# Allegro board r820t2.brd
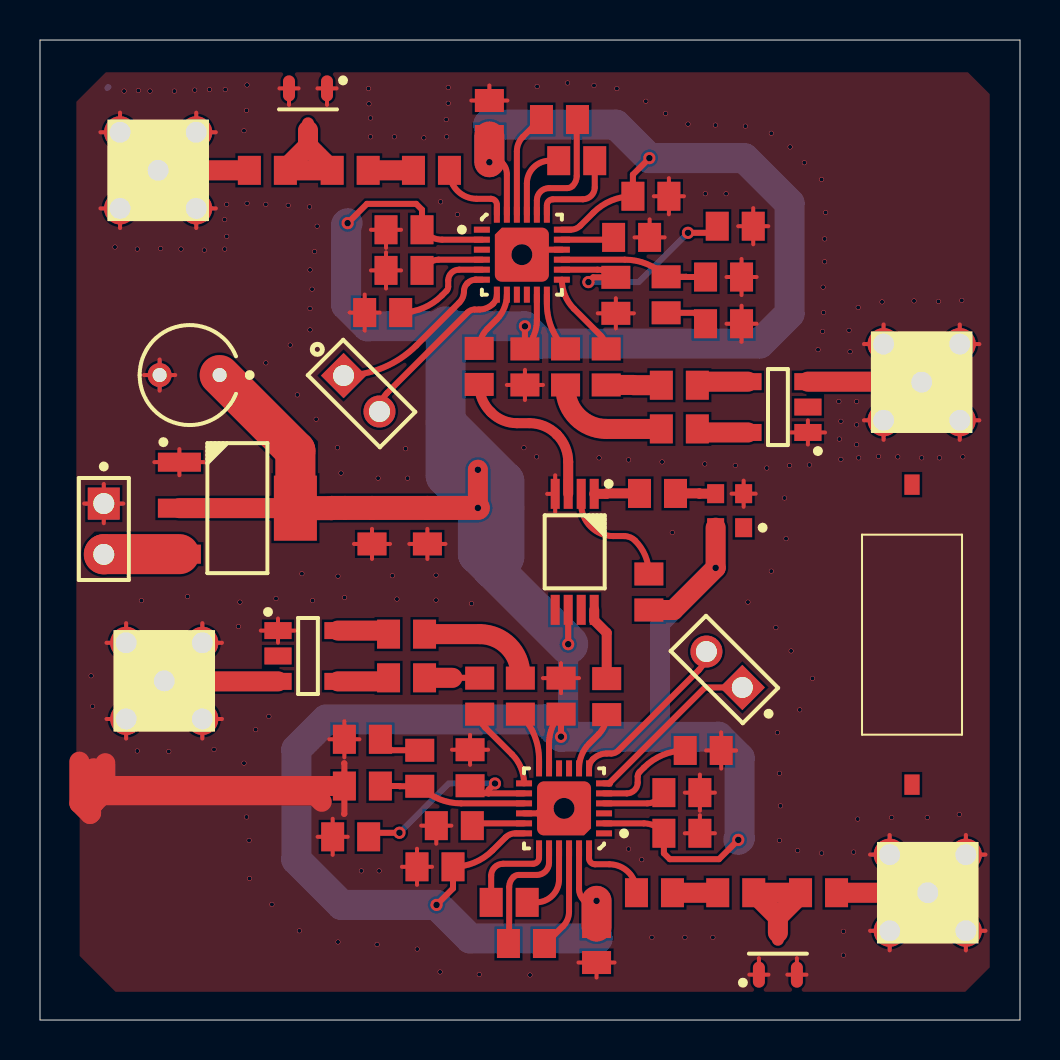
[diagram p0: board, top side]
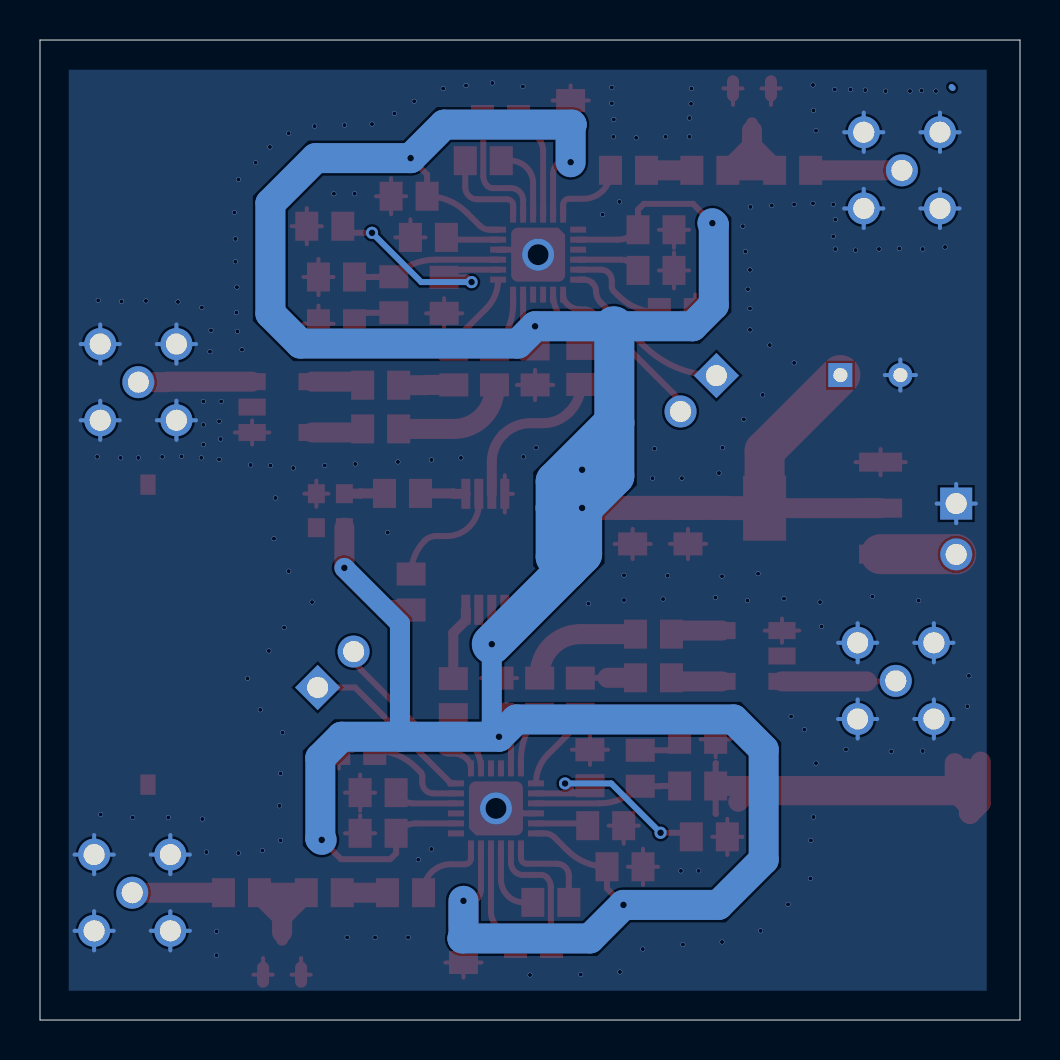
[diagram p1: board, bottom side, seen from below]

Outline 49 x 49 mm; copper layers: TOP, BOTTOM. Coordinates in mm from the lower left corner of the outline.
Outline path: 0,49 49,49 49,0 0,0 0,49

## Placement (name value [footprint] x y rotation side)
C1  330pF  [R0805]  15.51 42.48 0 top
C3  27pF/10nF  [R0805]  11.37 42.48 0 top
C5  1uF  [R0805]  18.2 37.48 0 top
C6  0.1uF  [R0805]  17.13 35.37 0 top
C7  20pF  [R0805]  21.96 32.68 90 top
C9  0.1uF  [R0805]  22.47 45.07 90 top
C10  0.1uF  [R0805]  30.55 41.19 0 top
C11  0.1uF  [R0805]  29.58 39.13 180 top
C12  330nF  [R0805]  34.18 37.15 180 top
C13  6.8nF  [R0805]  34.18 34.81 180 top
C14  0.1uF  [R0805]  31.97 29.55 180 top
C15  0.1uF  [R0805]  31.97 31.74 180 top
C16  0.1uF  [R0805]  28.79 36.23 270 top
C28  100nF  [R0805]  19.37 24.7 270 top
C29  330pF  [R0805]  16.6 24.7 90 top
C30  10uF  [CAPPRD300W51D500H1295P]  7.48 32.25 180 top
C31  0.1uF  [R0805]  18.2 39.51 180 top
C32  0.1uF  [R0805]  24.25 32.65 90 top
C49  0.1uF  [R0805]  30.88 26.33 0 top
C50  330pF  [R0805]  34.79 6.36 180 top
C51  27pF/10nF  [R0805]  38.93 6.36 180 top
C52  1uF  [R0805]  32.09 11.37 180 top
C53  0.1uF  [R0805]  33.16 13.48 180 top
C54  20pF  [R0805]  28.34 16.17 270 top
C55  0.1uF  [R0805]  32.09 9.34 0 top
C56  0.1uF  [R0805]  27.83 3.77 270 top
C57  0.1uF  [R0805]  20.72 9.72 0 top
C58  330nF  [R0805]  16.12 11.7 0 top
C59  6.8nF  [R0805]  16.12 14.04 0 top
C60  0.1uF  [R0805]  19.75 7.66 180 top
C61  0.1uF  [R0805]  18.33 19.29 0 top
C62  0.1uF  [R0805]  26.05 16.19 270 top
C63  0.1uF  [R0805]  18.33 17.11 0 top
C64  0.1uF  [R0805]  21.5 12.61 90 top
D1  BAV99/SOT  [SOT95P237X112-3N]  13.4 45.53 270 top
D2  BAV99/SOT  [SOT95P237X112-3N]  36.9 3.32 90 top
J3  -  [SMA]  44.08 31.89 0 top
J4  -  [SMA]  5.91 42.48 0 top
J5  HEADER 2  [HDRV2W64P254_1X2_508X254X838P]  3.19 25.82 270 top
J6  HEADER 2  [HDRV2W64P254_1X2_508X254X838P]  15.18 32.22 315 top
J7  -  [SMA]  6.21 16.96 180 top
J8  -  [SMA]  44.39 6.36 180 top
J9  HEADER 2  [HDRV2W64P254_1X2_508X254X838P]  35.12 16.63 135 top
L1  8.2nH  [R0805]  19.57 42.48 0 top
L4  150nH  [R0805]  25.97 45.02 0 top
L5  150nH  [R0805]  26.84 42.97 0 top
L6  8.2nH  [R0805]  30.72 6.36 180 top
L7  150nH  [R0805]  24.32 3.82 180 top
L8  150nH  [R0805]  23.46 5.88 180 top
R2  1.8K  [R0805]  31.31 36.26 270 top
R4  220  [R0805]  28.31 32.65 270 top
R5  220  [R0805]  26.28 32.65 270 top
R20  1.8K  [R0805]  30.44 21.4 270 top
R21  1.8K  [R0805]  34.76 39.69 0 top
R22  1.8K  [R0805]  18.99 12.59 90 top
R23  220  [R0805]  21.99 16.19 90 top
R24  220  [R0805]  24.02 16.19 90 top
R25  1.8K  [R0805]  15.53 9.16 180 top
R26  TEST_SYMBOL  [1CMX0_5CM]  43.6 19.27 90 top
U2  R820t  [R820T]  24.09 38.27 0 top
U4  AMS1117  [AMS1117_SOT223]  9.87 25.59 0 top
U5  TC-1T  [TC1-1T]  36.9 30.65 180 top
U8  -  [5PB1102PGGI]  26.74 23.41 270 top
U9  OSC28.8Mhz  [OSC2016]  34.48 25.47 180 top
U10  R820t  [R820T]  26.2 10.58 180 top
U11  TC-1T  [TC1-1T]  13.4 18.2 0 top

## Library data of the parts
C1 C3 C5-C7 C9-C16 C28 C29 C31 C32 C49-C64 = CAPACITOR NON-POL
C30 = CAP
D1 D2 = BAV99/SOT
J3 J4 J7 J8 = SMA
J5 J6 J9 = HEADER 2
L1 L4-L8 = INDUCTOR AUDIO
R2 R4 R5 R20-R26 = R
U2 U10 = R820t
U4 = AMS1117
U5 U11 = TC-1T
U8 = 5PB1102PGGI
U9 = OSC28.8Mhz

## Footprints (pads in the part's own frame, mm; a bottom-side part is the same pattern mirrored in y, then rotated)
1CMX0_5CM
  rect 1.016x0.762 smd: 1(-7.5,0) 2(7.5,0)
5PB1102PGGI
  rect 1.5x0.45 smd: 1(-2.9,0.975) 2(-2.9,0.325) 3(-2.9,-0.325) 4(-2.9,-0.975) 5(2.9,-0.975) 6(2.9,-0.325) 7(2.9,0.325) 8(2.9,0.975)
AMS1117_SOT223
  rect 2.15x0.95 smd: 1(-2.9,2.3) 2(-2.9,0) 3(-2.9,-2.3)
  rect 2.15x3.25 smd: 4(2.9,0)
CAPPRD300W51D500H1295P
  rect 1.2x1.2 hole 0.7: 1(-1.5,0)
  round 1.2 hole 0.7: 2(1.5,0)
HDRV2W64P254_1X2_508X254X838P
  rect 1.6x1.6 hole 1.05: 1(0,0)
  round 1.6 hole 1.05: 2(2.54,0)
OSC2016
  rect 0.85x0.95 smd: 1(-0.7,0.85) 2(-0.7,-0.85) 3(0.7,-0.85) 4(0.7,0.85)
R0805
  rect 1.15x1.45 smd: 1(-0.9,0) 2(0.9,0)
R820T
  rect 0.8x0.3 smd: 1(-2,1.25) 2(-2,0.75) 3(-2,0.25) 4(-2,-0.25) 5(-2,-0.75) 6(-2,-1.25) 13(2,-1.25) 14(2,-0.75) 15(2,-0.25) 16(2,0.25) 17(2,0.75) 18(2,1.25)
  rect 0.3x0.8 smd: 7(-1.25,-2) 8(-0.75,-2) 9(-0.25,-2) 10(0.25,-2) 11(0.75,-2) 12(1.25,-2) 19(1.25,2) 20(0.75,2) 21(0.25,2) 22(-0.25,2) 23(-0.75,2) 24(-1.25,2)
  custom 2.7x2.7 smd: 25(0,0)
SMA
  round 1.6 hole 1.05: 1(0,0) 2(1.905,1.905) 3(1.905,-1.905) 4(-1.905,-1.905) 5(-1.905,1.905)
SOT95P237X112-3N
  oval 1.3x0.6 smd: 1(-1.05,0.95) 2(-1.05,-0.95) 3(1.05,0)
TC1-1T
  rect 1.36x0.85 smd: 1(-1.5,1.27) 2(-1.5,0) 3(-1.5,-1.27) 4(1.5,-1.27) 6(1.5,1.27)

## Nets
GND: C5.1 C6.1 C9.2 C10.2 C11.1 C12.1 C13.1 C16.2 C28.2 C29.1 C30.2 C31.2 C32.1 C52.1 C53.1 C55.2 C56.2 C57.1 C58.1 C59.1 C60.2 C62.1 C64.2 D1.1 D1.2 D2.1 D2.2 J3.2 J3.3 J3.4 J3.5 J4.2 J4.3 J4.4 J4.5 J5.1 J7.2 J7.3 J7.4 J7.5 J8.2 J8.3 J8.4 J8.5 R21.2 R25.2 U2.16(GND_16) U2.25(PAD) U4.1(GND) U5.1 U8.4(GND) U9.2(GND) U10.16(GND_16) U10.25(PAD) U11.1
VCC3V3: C9.1 C10.1 C28.1 C29.2 C30.1 C31.1 C32.2 C55.1 C56.1 C60.1 C62.2 R20.2 U2.2(VCC_2) U2.11(VCC_11) U2.18(VCC_18) U2.23(VCC_23) U4.2(VOUT) U4.4(OUT) U8.6(VCC) U9.4(VDD) U10.2(VCC_2) U10.11(VCC_11) U10.18(VCC_18) U10.23(VCC_23)
VCC5V: J5.2 U4.3(VIN)
CLK_1: C7.1 U8.3(Y0)
CLK_2: C54.1 U8.8(Y1)
CLK_IN: C49.1 U8.1(CLK_IN)
N00923: R5.1 U2.12(IF_N)
N01579: L1.2 U2.24(RF_IN)
N01613: C1.2 L1.1
N01685: C1.1 C3.2 D1.3
N02319: C5.2 U2.4(DET1)
N02329: C6.2 U2.5(DET2)
N02509: C7.2 U2.8(XTAL_I)
N03111: L4.1 U2.22(TF1P)
N03115: L5.1 U2.21(TF1N)
N03119: L5.2 U2.19(TF2N)
N03131: L4.2 U2.20(TF2P)
N03936: C11.2 U2.17(VDD_PLL)
N04054: C12.2 R2.1 U2.15(CP)
N04195: C13.2 R2.2
N04932: C16.1 R21.1 U2.14(IF_AGC)
N04990: C14.1 U5.6
N05012: R4.1 U2.13(IF_P)
N05168: C15.1 U5.4
N05567: C15.2 R4.2
N05644: C14.2 R5.2
N06440: J6.2 U2.7(SDA)
N32998: J3.1 U5.3
N34016: C3.1 J4.1
N38417: R20.1 U8.2(OE)
N39782: C49.2 U9.3(OUT)
N42339: J6.1 U2.6(SCL)
N50631: R24.1 U10.12(IF_N)
N50647: L6.2 U10.24(RF_IN)
N50677: C50.2 L6.1
N50697: C50.1 C51.2 D2.3
N50745: C52.2 U10.4(DET1)
N50769: C53.2 U10.5(DET2)
N50833: C54.2 U10.8(XTAL_I)
N50893: L7.1 U10.22(TF1P)
N50897: L8.1 U10.21(TF1N)
N50901: L8.2 U10.19(TF2N)
N50929: L7.2 U10.20(TF2P)
N51037: J9.1 U10.6(SCL)
N51041: C57.2 U10.17(VDD_PLL)
N51069: C58.2 R22.1 U10.15(CP)
N51145: C59.2 R22.2
N51193: C64.1 R25.1 U10.14(IF_AGC)
N51213: C61.1 U11.6
N51217: R23.1 U10.13(IF_P)
N51261: C63.1 U11.4
N51273: C63.2 R23.2
N51293: C61.2 R24.2
N51433: J9.2 U10.7(SDA)
N51449: J7.1 U11.3
N51529: C51.1 J8.1

Pads without a net: R26 1 2; U2 1 3 9 10; U5 2; U8 5 7; U9 1; U10 1 3 9 10; U11 2

## Via types
v1: diameter 0.61, hole 0.33, TOP to BOTTOM, 16 vias
v2: diameter 0.24, hole 0.21, TOP to BOTTOM, 164 vias
v3: diameter 1.6, hole 1.05, TOP to BOTTOM, 2 vias

## Routing (per net, layer and track width the routed paths; a pad name or vN(x,y) marks a point on that pad's centre or on a via; arc(x,y) is an arc through that point)
GND: length 269.3
  TOP w0.2: 13.88,9.16 R25.2 ; R25.2 15.39,9.16 ; R25.2 14.63,8.26 ; R25.2 14.63,10.06 ; 13.87,46.58 D1.1 ; D1.1 14.83,46.58 ; D1.1 14.35,45.75 ; 16.23,34.47 C6.1 ; C6.1 15.48,35.37 ; C6.1 16.99,35.37 ; C6.1 16.23,36.27 ; 6.97,27.24 U4.1 ; U4.1 6.97,28.55 ; U4.1 8.22,27.89 ; U4.1 5.72,27.89 ; J7.2 5.29,15.05 ; J7.2 4.31,16.03 ; J7.2 3.33,15.05 ; J7.2 4.31,14.07 ; 29.73,39.13 C11.1 ; C11.1 30.48,40.03 ; C11.1 31.23,39.13 ; C55.2 32.99,10.24 ; C55.2 33.75,9.34 ; C55.2 32.24,9.34 ; C30.2 5.98,33.02 ; C30.2 5.98,31.47 ; C30.2 6.76,32.25 ; C30.2 5.2,32.25 ; 25.76,25.38 U8.4 ; U8.4 25.76,27.24 ; U8.4 25.36,26.31 ; 19.06,9.72 C57.1 ; C57.1 20.57,9.72 ; C57.1 19.82,8.81 ; C5.1 17.3,38.38 ; C5.1 18.05,37.48 ; C5.1 17.3,36.58 ; C5.1 16.55,37.48 ; U5.1 39.25,29.38 ; U5.1 38.4,28.77 ; U5.1 37.54,29.38 ; U5.1 38.4,29.98 ; J4.3 8.79,40.58 ; J4.3 6.83,40.58 ; J4.3 7.81,39.6 ; J4.3 7.81,41.56 ; 15.7,23.8 C29.1 ; C29.1 16.6,23.05 ; C29.1 17.5,23.8 ; C29.1 16.6,24.56 ; C56.2 28.73,2.87 ; C56.2 27.83,2.12 ; C56.2 26.92,2.87 ; 26.05,16.34 C62.1 ; C62.1 26.95,17.09 ; C62.1 25.15,17.09 ; C62.1 26.05,17.85 ; 34.91,39.69 R21.2 ; R21.2 35.66,40.59 ; R21.2 36.41,39.69 ; R21.2 35.66,38.79 ; 7.14,18.86 J7.4 ; J7.4 9.1,18.86 ; J7.4 8.12,19.84 ; J7.4 8.12,17.88 ; 27.89,35.33 C16.2 ; C16.2 29.7,35.33 ; C16.2 28.79,36.09 ; C16.2 28.79,34.58 ; C10.2 32.2,41.19 ; C10.2 30.69,41.19 ; C10.2 31.45,42.09 ; C10.2 31.45,40.28 ; J8.2 43.46,4.46 ; J8.2 41.51,4.46 ; J8.2 42.48,3.48 ; J8.2 42.48,5.44 ; 4,43.41 J4.5 ; J4.5 4,45.37 ; J4.5 4.98,44.39 ; J4.5 3.02,44.39 ; J4.2 7.81,45.37 ; J4.2 6.83,44.39 ; J4.2 8.79,44.39 ; J4.2 7.81,43.41 ; D1.2 12.93,46.58 ; D1.2 11.97,46.58 ; D1.2 12.45,45.75 ; C28.2 20.27,23.8 ; C28.2 19.37,24.56 ; C28.2 18.47,23.8 ; C28.2 19.37,23.05 ; U11.1 11.9,20.07 ; U11.1 12.76,19.47 ; U11.1 11.04,19.47 ; U11.1 11.9,18.87 ; 46.29,3.48 J8.5 ; J8.5 45.32,4.46 ; J8.5 46.29,5.44 ; J8.5 47.27,4.46 ; 41.2,33.8 J3.5 ; J3.5 42.18,32.82 ; J3.5 42.18,34.77 ; J3.5 43.16,33.8 ; J8.4 47.27,8.27 ; J8.4 45.32,8.27 ; J8.4 46.29,9.25 ; J8.4 46.29,7.29 ; 3.02,40.58 J4.4 ; J4.4 4.98,40.58 ; J4.4 4,41.56 ; J4.4 4,39.6 ; 42.18,29.01 J3.4 ; J3.4 41.2,29.99 ; J3.4 43.16,29.99 ; J3.4 42.18,30.96 ; C52.1 32.99,12.27 ; C52.1 33.75,11.37 ; C52.1 32.24,11.37 ; C52.1 32.99,10.47 ; U9.2 35.18,26.97 ; U9.2 34.58,26.32 ; U9.2 35.18,25.66 ; U9.2 35.79,26.32 ; 15.22,13.13 C59.1 ; C59.1 14.46,14.04 ; C59.1 15.97,14.04 ; C59.1 15.22,14.94 ; C53.1 34.81,13.48 ; C53.1 34.06,12.57 ; C53.1 33.31,13.48 ; C53.1 34.06,14.38 ; C13.1 35.83,34.81 ; C13.1 34.32,34.81 ; C13.1 35.08,33.91 ; C13.1 35.08,35.72 ; 21.57,45.97 C9.2 ; C9.2 23.37,45.97 ; C9.2 22.47,46.73 ; 18.1,7.66 C60.2 ; C60.2 19.6,7.66 ; C60.2 18.85,8.56 ; C60.2 18.85,6.76 ; 34.32,37.15 C12.1 ; C12.1 35.83,37.15 ; C12.1 35.08,38.05 ; C12.1 35.08,36.25 ; 16.55,39.51 C31.2 ; C31.2 17.3,38.61 ; C31.2 18.05,39.51 ; J5.1 3.19,26.8 ; J5.1 3.19,24.84 ; J5.1 2.21,25.82 ; J5.1 4.17,25.82 ; D2.2 37.85,3.09 ; D2.2 37.37,2.27 ; D2.2 38.32,2.27 ; 4.31,17.88 J7.3 ; J7.3 3.33,18.86 ; J7.3 5.29,18.86 ; J7.3 4.31,19.84 ; D2.1 36.42,2.27 ; D2.1 35.47,2.27 ; D2.1 35.95,3.09 ; 42.48,7.29 J8.3 ; J8.3 41.51,8.27 ; J8.3 42.48,9.25 ; J8.3 43.46,8.27 ; C32.1 24.25,32.51 ; C32.1 24.25,31 ; C32.1 25.15,31.75 ; C32.1 23.34,31.75 ; 45.99,32.82 J3.2 ; J3.2 46.97,33.8 ; J3.2 45.01,33.8 ; J3.2 45.99,34.77 ; 45.99,29.01 J3.3 ; J3.3 45.01,29.99 ; J3.3 45.99,30.96 ; J3.3 46.97,29.99 ; 8.12,14.07 J7.5 ; J7.5 8.12,16.03 ; J7.5 9.1,15.05 ; J7.5 7.14,15.05 ; C64.2 21.5,14.27 ; C64.2 20.6,13.51 ; C64.2 22.41,13.51 ; C64.2 21.5,12.76
  TOP w0.3: U10.16 24.87,10.33 25.12,10.58 v3(26.2,10.58) ; 15.2,12.84 15.22,12.83 C58.1 15.22,10.32 15.2,10.3 ; U2.16 24.34,38.52 v3(24.09,38.27)
  TOP w1: C58.1 3.55,11.7 3.27,11.41 ; 3.27,11.41 3.27,12.84 ; 3.27,11.41 3.09,11.24 ; 3.09,11.24 13.76,11.24 14.09,10.91 ; 3.09,11.24 2.68,10.83 ; 2.68,10.83 2.55,10.7 2.55,10.35 2.5,10.3 1.97,10.83 1.97,12.92 ; 2.68,10.83 2.68,12.59
  BOTTOM w0.2: J3.5 43.16,33.8 ; J3.5 42.18,34.77 ; J3.5 42.18,32.82 ; J3.5 41.2,33.8 ; 41.2,29.99 J3.4 ; J3.4 42.18,30.96 ; J3.4 42.18,29.01 ; J3.4 43.16,29.99 ; J8.3 42.48,9.25 ; J8.3 42.48,7.29 ; J8.3 41.51,8.27 ; J8.3 43.46,8.27 ; J7.4 9.1,18.86 ; J7.4 8.12,19.84 ; J7.4 7.14,18.86 ; J7.4 8.12,17.88 ; J5.1 4.17,25.82 ; J5.1 3.19,24.84 ; J5.1 3.19,26.8 ; J5.1 2.21,25.82 ; J4.3 7.81,41.56 ; J4.3 8.79,40.58 ; J4.3 6.83,40.58 ; J4.3 7.81,39.6 ; J8.4 47.27,8.27 ; J8.4 46.29,9.25 ; J8.4 46.29,7.29 ; J8.4 45.32,8.27 ; 45.01,33.8 J3.2 ; J3.2 46.97,33.8 ; J3.2 45.99,32.82 ; J3.2 45.99,34.77 ; J7.2 5.29,15.05 ; J7.2 3.33,15.05 ; J7.2 4.31,14.07 ; J7.2 4.31,16.03 ; J7.3 5.29,18.86 ; J7.3 4.31,19.84 ; J7.3 3.33,18.86 ; J7.3 4.31,17.88 ; 42.48,3.48 J8.2 ; J8.2 41.51,4.46 ; J8.2 43.46,4.46 ; J8.2 42.48,5.44 ; 4,43.41 J4.5 ; J4.5 4,45.37 ; J4.5 4.98,44.39 ; J4.5 3.02,44.39 ; 45.99,29.01 J3.3 ; J3.3 45.99,30.96 ; J3.3 45.01,29.99 ; J3.3 46.97,29.99 ; J4.2 8.79,44.39 ; J4.2 7.81,43.41 ; J4.2 6.83,44.39 ; J4.2 7.81,45.37 ; J4.4 4.98,40.58 ; J4.4 4,39.6 ; J4.4 3.02,40.58 ; J4.4 4,41.56 ; C30.2 6.76,32.25 ; C30.2 5.2,32.25 ; C30.2 5.98,33.02 ; C30.2 5.98,31.47 ; 7.14,15.05 J7.5 ; J7.5 8.12,14.07 ; J7.5 9.1,15.05 ; J7.5 8.12,16.03 ; 45.32,4.46 J8.5 ; J8.5 46.29,5.44 ; J8.5 47.27,4.46 ; J8.5 46.29,3.48
  vias: v2(2.55,17.21) v2(2.63,15.69) v2(3.75,38.65) v2(4.21,46.45) v2(4.92,46.47) v2(4.87,38.55) v2(4.87,13.45) v2(5.07,20.97) v2(5.5,46.45) v2(6.03,38.57) v2(6.44,13.43) v2(6.72,46.45) v2(7.05,38.55) v2(7.38,21.17) v2(7.74,46.5) v2(8.22,38.5) v2(8.47,46.52) v2(8.7,13.53) v2(9.23,40.02) v2(9.23,38.55) v2(9.26,46.52) v2(9.34,40.78) v2(9.34,39.18) v2(9.92,19.67) v2(10,20.89) v2(10.2,44.46) v2(10.2,12.84) v2(10.33,45.48) v2(10.33,10.15) v2(10.35,46.75) v2(10.35,40.83) v2(10.45,8.98) v2(10.48,7.08) v2(10.78,14.52) v2(11.29,40.78) v2(11.29,32.86) v2(11.44,15.18) v2(11.6,5.78) v2(11.8,21.07) v2(12.41,40.73) v2(12.51,33.75) v2(12.87,31.26) v2(12.97,4.46) v2(13.1,22.32) v2(13.48,40.65) v2(13.5,37.5) v2(13.5,35.57) v2(13.5,34.51) v2(13.6,36.54) v2(13.63,20.97) v2(13.73,38.42) v2(13.81,30.04) v2(13.86,39.69) v2(14.87,28.61) v2(14.9,22.19) v2(14.9,3.9) v2(15.05,27.34) v2(15.23,21.12) v2(16.07,7.46) v2(16.42,46.57) v2(16.45,45.81) v2(16.52,45.1) v2(16.52,44.16) v2(16.91,27.09) v2(16.85,3.77) v2(16.96,7.46) v2(17.62,22.21) v2(17.72,44.16) v2(17.85,21.05) v2(18.28,28.56) v2(18.38,27.09) v2(18.86,3.55) v2(19.19,44.11) v2(19.8,22.24) v2(19.8,20.99) v2(20.03,40.91) v2(20,2.4) v2(20.31,45.02) v2(20.33,44.16) v2(20.41,46.62) v2(20.41,45.84) v2(20.87,40.27) v2(21.58,20.82) v2(21.96,2.27) v2(24.2,28.61) v2(24.5,2.25) v2(24.83,28.16) v2(24.86,46.67) v2(26.38,46.85) v2(27.7,46.73) v2(27.95,28.11) v2(28.84,46.57) v2(29.43,28.01) v2(29.43,8.55) v2(30.09,8.02) v2(30.29,45.94) v2(30.6,4.13) v2(31.1,27.9) v2(31.28,45.33) v2(31.61,24.37) v2(32.25,4.13) v2(32.4,44.79) v2(33.24,27.8) v2(33.26,41.31) v2(33.64,4.13) v2(33.77,44.74) v2(34.3,41.31) v2(34.76,27.73) v2(35.27,44.69) v2(35.4,20.89) v2(36.34,27.6) v2(36.56,44.34) v2(36.56,22.44) v2(36.79,19.62) v2(36.87,14.37) v2(36.97,12.33) v2(37.02,10.71) v2(36.97,8.98) v2(37.23,26.1) v2(37.3,24.07) v2(37.5,43.65) v2(37.48,27.73) v2(37.56,18.45) v2(37.89,8.47) v2(37.99,15.51) v2(38.22,42.86) v2(38.47,27.75) v2(38.62,17.08) v2(38.9,33.52) v2(39.08,42.03) v2(39.13,34.43) v2(39.08,8.35) v2(39.23,39.05) v2(39.23,37.91) v2(39.16,36.64) v2(39.18,35.37) v2(39.28,40.38) v2(39.94,30.93) v2(40.04,29.94) v2(39.97,29.05) v2(40.04,28.03) v2(40.17,4.43) v2(40.17,3.24) v2(40.45,34.48) v2(40.5,33.42) v2(40.68,8.4) v2(40.83,30.93) v2(40.83,29.76) v2(40.83,28.77) v2(40.91,35.63) v2(40.93,28.11) v2(40.88,10.05) v2(41.92,28.18) v2(42.1,35.9) v2(42.58,10.12) v2(42.89,28.16) v2(43.7,35.96) v2(44.08,28.11) v2(44.36,10.12) v2(44.92,35.93) v2(44.97,28.11) v2(45.96,10.28) v2(46.09,35.98) v2(46.14,28.16)
VCC3V3: length 228.6
  TOP w0.3: U8.6 v1(26.41,18.79) ; U2.2 20.11,39.02 arc(19.63,39.11) 19.23,39.38 C31.1 19.1,40.51 18.81,40.81 16.35,40.81 v1(15.38,39.84) ; U10.2 30.19,9.83 arc(30.66,9.74) 31.06,9.47 C55.1 31.19,8.33 31.49,8.04 33.95,8.04 v1(34.91,9.01) ; v1(19.83,5.75) 20.65,6.58 C60.1 arc(21.72,7.87) 22.63,8.48 23.28,9.13 arc(23.5,9.28) 23.76,9.33 U10.18 ; v1(30.47,43.09) 29.65,42.27 C10.1 arc(28.58,40.98) 27.67,40.37 27.01,39.71 arc(26.8,39.57) 26.54,39.52 U2.18 ; U2.11 24.84,35 arc(24.69,34.22) C32.2 v1(24.25,34.69) ; U10.23 26.95,6.56 arc(27.01,6.25) 27.19,5.98 27.35,5.83 arc(27.7,5.3) C56.1 ; v1(26.05,14.16) C62.2 arc(25.61,14.63) 25.45,13.85 U10.11 ; U2.23 23.34,42.28 arc(23.28,42.6) 23.1,42.86 22.95,43.02 arc(22.59,43.55) C9.1
  TOP w1: U4.4 U4.2 ; U9.4 v1(33.78,22.61) 31.68,20.5 R20.2 ; 14.57,25.59 15.24,25.59 15.25,25.6 ; v1(21.89,25.6) v1(21.89,27.51)
  TOP w1.2: v1(21.89,25.6) C28.1 C29.2 14.58,25.6 14.57,25.59 U4.4
  TOP w1.5: C9.1 v1(22.47,42.89) ; C56.1 v1(27.83,5.96)
  TOP w2: C30.1 12.77,28.46 U4.4
  BOTTOM w1: v1(26.41,18.79) 26.41,14.52 v1(26.05,14.16) ; v1(33.78,22.61) 31,19.83 31,14.19 30.98,14.16
  BOTTOM w1.5: v1(15.38,39.84) 15.31,39.77 15.31,35.75 16.37,34.69 v1(24.25,34.69) 25.11,33.82 35.98,33.82 37.48,35.32 37.48,40.83 35.22,43.09 v1(30.47,43.09) 28.79,44.77 22.42,44.77 22.47,44.72 v1(22.47,42.89) ; v1(27.83,5.96) 27.83,4.13 27.88,4.08 21.5,4.08 v1(19.83,5.75) 15.08,5.75 12.82,8.02 12.82,13.53 14.32,15.03 25.19,15.03 v1(26.05,14.16) 33.92,14.16 34.98,13.1 34.98,9.08 v1(34.91,9.01)
  BOTTOM w2: 22.63,22.57 v1(26.41,18.79) ; 22.63,22.57 23.22,23.16 23.22,25.6 ; 22.63,22.57 21.89,23.31 v1(21.89,25.6) ; 20.28,29.86 23.22,26.93 23.22,25.6 ; 20.28,29.86 20.28,34.66 20.31,34.69 ; 20.28,29.86 20.28,27.21 v1(21.89,25.6) ; v1(21.89,25.6) 23.22,25.6
VCC5V: length 3.8
  TOP w2: J5.2 3.2,23.29 U4.3
CLK_1: length 8.3
  TOP w0.5: U8.3 26.41,27.9 arc(26.26,28.64) 25.84,29.27 25.84,29.27 arc(25.21,29.69) 24.47,29.84 23.84,29.84 arc(23.15,29.98) 22.57,30.37 22.53,30.41 arc(22.11,31.04) C7.1
CLK_2: length 3.7
  TOP w0.5: U8.8 27.71,19.98 28.34,19.36 C54.1
CLK_IN: length 2.3
  TOP w0.5: U8.1 28.31,26.31 28.33,26.33 C49.1
Net_1: length 0.1
  BOTTOM w0.3: 3.42,46.65 3.37,46.6
N00923: length 3
  TOP w0.3: U2.12 25.34,35.81 arc(25.59,34.59) R5.1
N01579: length 3.9
  TOP w0.3: U2.24 22.84,40.76 arc(22.76,40.97) 22.54,41.06 21.83,41.06 arc(20.87,41.46) 20.47,42.42 L1.2
N01613: length 2.3
  TOP w1: C1.2 L1.1
N01685: length 6.5
  TOP w1: 13.4,43.69 C1.1 C3.2 12.27,42.56 13.4,43.69 ; 13.4,43.69 D1.3
N02319: length 3.2
  TOP w0.3: C5.2 19.43,37.81 arc(19.66,37.96) 19.93,38.02 U2.4
N02329: length 5.1
  TOP w0.3: U2.5 20.96,37.52 arc(20.57,37.36) 20.41,36.97 20.41,36.66 arc(20.39,36.55) 20.32,36.45 20.1,36.23 arc(19.15,35.59) C6.2
N02509: length 3.1
  TOP w0.3: U2.8 arc(23.21,35.59) 22.83,35.02 22.37,34.56 arc(22.07,34.11) C7.2
N03111: length 5.4
  TOP w0.3: L4.1 24.98,45.02 24.98,45.06 25.04,45.06 24.14,44.16 arc(23.92,43.83) 23.84,43.43 U2.22
N03115: length 3.8
  TOP w0.3: L5.1 25.49,42.97 arc(24.68,42.63) 24.34,41.82 U2.21
N03119: length 4.7
  TOP w0.3: L5.2 27.74,41.63 arc(27.56,41.21) 27.14,41.04 25.64,41.04 arc(25.43,40.95) 25.34,40.74 U2.19
N03131: length 6.3
  TOP w0.3: L4.2 26.84,45.02 26.84,42.2 arc(26.78,41.93) 26.63,41.71 arc(26.51,41.62) 26.36,41.59 25.45,41.59 arc(25.02,41.42) 24.84,40.98 U2.20
N03936: length 2.6
  TOP w0.3: U2.17 28.41,39.02 arc(28.55,39.05) C11.2
N04054: length 8.4
  TOP w0.3: 32.32,37.15 31.31,37.15 ; 32.32,37.15 C12.2 ; 32.32,37.15 32.31,37.16 R2.1 arc(30.36,37.79) 29.24,38.02 U2.15
N04195: length 2.2
  TOP w0.3: C13.2 32.73,35.36 R2.2
N04932: length 11.9
  TOP w0.3: U2.14 27.87,37.52 arc(28.37,37.42) C16.1 27.66,37.13 v1(27.42,36.9) ; v1(32.4,39.36) 33.53,39.36 R21.1
  BOTTOM w0.3: v1(27.42,36.9) 29.94,36.9 v1(32.4,39.36)
N04990: length 2.6
  TOP w1: C14.1 33.05,29.38 U5.6
N05012: length 4.3
  TOP w0.3: U2.13 arc(26.25,36.23) 26.7,35.56 28.03,34.23 arc(28.24,33.92) R4.1
N05168: length 2.6
  TOP w1: U5.4 33.05,31.92 C15.1
N05567: length 5.5
  TOP w0.3: R4.2 28.31,31.74 29.68,31.74 ; 29.66,31.75 31.07,31.75
  TOP w1: C15.2 29.68,31.74 ; R4.2 29.66,31.75
N05644: length 6.1
  TOP w1: R5.2 26.28,31.59 arc(26.87,30.15) 28.31,29.55 C14.2
N06440: length 8.6
  TOP w0.3: U2.7 arc(22.79,36.02) 22.66,35.81 arc(22.34,35.6) 21.96,35.52 21.73,35.52 arc(21.54,35.49) 21.38,35.38 17.36,31.35 arc(17.07,30.93) J6.2
N32998: length 11.4
  TOP w0.3: 42.63,31.92 44.08,31.92 J3.1 ; 42.66,31.89 38.4,31.89
  TOP w1: J3.1 42.66,31.89 ; U5.3 42.63,31.92
N34016: length 4.6
  TOP w1: C3.1 J4.1
N38417: length 6
  TOP w0.3: R20.1 30.44,22.31 arc(30.27,23.21) 29.76,23.97 arc(29.5,24.14) 29.21,24.2 28.67,24.2 arc(27.53,24.67) 27.06,25.8 U8.2
N39782: length 2
  TOP w0.5: C49.2 32.97,26.33 32.98,26.32 U9.3
N42339: length 8.9
  TOP w0.3: U2.6 21.79,37.02 arc(21.57,36.97) 21.38,36.84 21.36,36.83 arc(21.24,36.65) 21.2,36.44 arc(21.14,36.13) 20.96,35.87 18.82,33.73 arc(17.15,32.61) J6.1
N50631: length 3
  TOP w0.3: U10.12 24.95,13.04 arc(24.71,14.26) R24.1
N50647: length 3.9
  TOP w0.3: 29.82,6.36 29.82,6.43 arc(29.42,7.39) 28.46,7.79 27.75,7.79 arc(27.54,7.87) 27.45,8.09 U10.24
N50677: length 2.3
  TOP w1: C50.2 L6.1
N50697: length 6.5
  TOP w1: 36.9,5.16 C50.1 C51.2 38.03,6.29 36.9,5.16 ; 36.9,5.16 D2.3
N50745: length 3.2
  TOP w0.3: U10.4 30.37,10.83 arc(30.64,10.88) 30.86,11.04 C52.2
N50769: length 5.1
  TOP w0.3: U10.5 29.34,11.33 arc(29.73,11.49) 29.88,11.88 29.88,12.18 arc(29.91,12.3) 29.97,12.4 30.2,12.62 arc(31.15,13.25) C53.2
N50833: length 3.1
  TOP w0.3: C54.2 arc(28.23,14.74) 27.93,14.29 27.47,13.83 arc(27.09,13.26) U10.8
N50893: length 5.4
  TOP w0.3: L7.1 25.32,3.82 25.32,3.79 25.25,3.79 26.15,4.69 arc(26.37,5.02) 26.45,5.41 U10.22
N50897: length 3.8
  TOP w0.3: U10.21 25.95,7.02 arc(25.62,6.22) 24.81,5.88 L8.1
N50901: length 4.7
  TOP w0.3: L8.2 22.56,7.22 arc(22.73,7.64) 23.15,7.81 24.65,7.81 arc(24.86,7.9) 24.95,8.11 U10.19
N50929: length 6.3
  TOP w0.3: L7.2 23.46,3.82 23.46,6.65 arc(23.51,6.91) 23.66,7.14 arc(23.79,7.22) 23.93,7.25 24.84,7.25 arc(25.27,7.43) 25.45,7.86 U10.20
N51037: length 9
  TOP w0.3: J9.1 33.25,16.63 28.45,11.83 ; 28.5,11.83 28.45,11.83 ; 28.45,11.83 U10.6
N51041: length 2.6
  TOP w0.3: U10.17 21.89,9.83 arc(21.74,9.8) C57.2
N51069: length 7.4
  TOP w0.3: C58.2 17.98,11.7 17.99,11.69 R22.1 arc(19.94,11.05) 21.06,10.83 U10.15
N51145: length 2.2
  TOP w0.3: R22.2 17.57,13.49 C59.2
N51193: length 10.8
  TOP w0.3: v1(17.97,9.36) 16.64,9.36 R25.1 ; U10.14 22.43,11.33 ; 22.43,11.33 22.43,11.5 v1(22.75,11.83) ; 22.43,11.33 arc(21.93,11.43) C64.1
  BOTTOM w0.3: v1(22.75,11.83) 20.44,11.83 v1(17.97,9.36)
N51213: length 2.6
  TOP w1: U11.6 17.25,19.47 C61.1
N51217: length 4.3
  TOP w0.3: U10.13 arc(24.05,12.62) 23.6,13.28 22.27,14.62 arc(22.06,14.93) R23.1
N51261: length 2.6
  TOP w1: U11.4 17.25,16.93 C63.1
N51273: length 2.8
  TOP w0.3: 20.62,17.11 21.99,17.11 R23.2
  TOP w1: C63.2 20.62,17.11
N51293: length 6.1
  TOP w1: R24.2 24.02,17.26 arc(23.42,18.7) 21.99,19.29 C61.2
N51433: length 8.6
  TOP w0.3: U10.7 arc(27.5,12.83) 27.64,13.03 arc(27.96,13.25) 28.34,13.32 28.56,13.32 arc(28.75,13.36) 28.91,13.47 32.94,17.49 arc(33.22,17.92) J9.2
N51449: length 5.7
  TOP w0.3: 7.66,16.93 6.21,16.93 J7.1
  TOP w1: U11.3 7.66,16.93
N51529: length 4.6
  TOP w1: C51.1 J8.1

## Copper pours and planes (outline as drawn; the poured copper is in the pictures)
GND on TOP: 15.58,12.13 15.58,10.96 3.08,10.96 2.77,10.66 2.48,10.66 1.98,10.16 1.98,3.2 3.77,1.41 46.27,1.41 47.49,2.63 47.49,46.29 46.39,47.39 3.29,47.39 1.82,45.91 1.82,12.36 2.05,12.13 ; 5 cut-outs
GND on BOTTOM: 1.67,47.51 1.67,1.46 47.56,1.46 47.56,47.51

## Text on the board
DISPLAY_TOP: FIGURE | SIZE | 0.21 | 0.3302 | 0.7 | 1.05 | DRILL CHART: TOP to BOTTOM | ALL UNITS ARE IN MILLIMETERS | PLATED | QTY | 164 | 16 | 1 | 3 | 25
